# Altium PCB FIT_PM_Dual_Range_AFE.PcbDoc (part 6 of 17)
Units mm, origin at the board's own origin, x right, y up, seen from the top; angles counter-clockwise.
Board outline 259 x 114 mm, 8 copper layers (Top Layer, Mid-Layer 1, Mid-Layer 2, Layer 1, Layer 2, Mid-Layer 3, Mid-Layer 4, Bottom Layer), stack 1.616 mm thick; 963 components, 806 nets, 4757 pads, 2208 vias.
Unrouted connection lines stored in the file: 682.
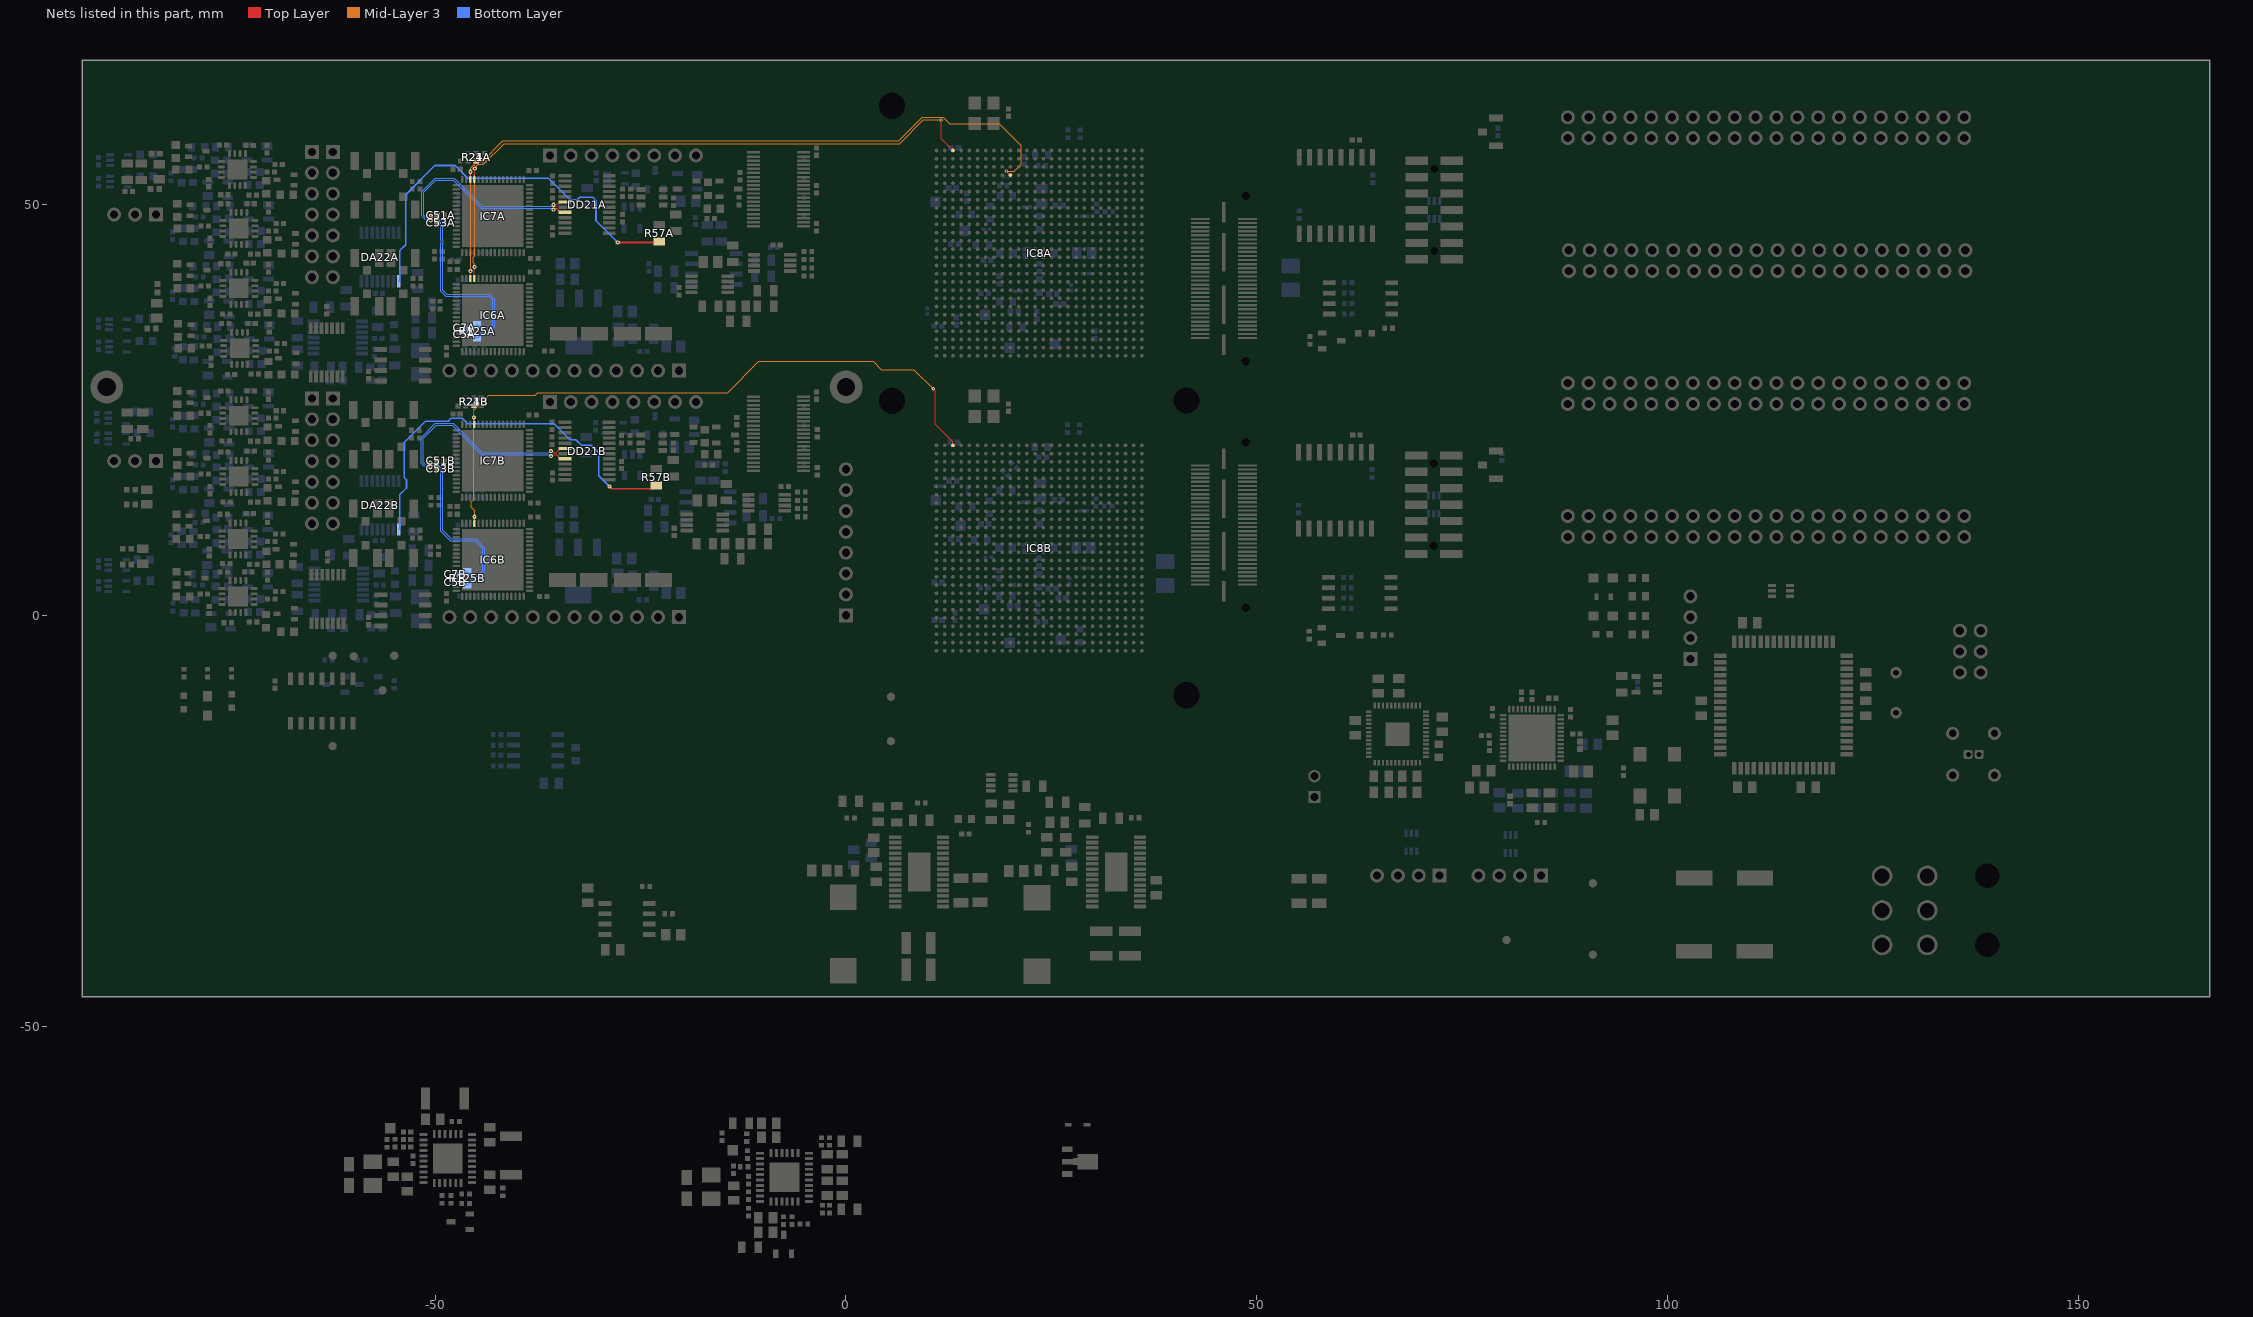
[diagram p8: the nets of this part, all layers, seen from the top]

## Part data (continued)
U1A U1B: library part CMP-0327-00232-3, "2.0 Gbps 4 x 4 Crosspoint Switch with CML, LVDS, LVPECL Input and LVDS Output, 4 Tx and 4 Rx, -40 to +85 degC, 38-pin TSSOP (DBT), Green (RoHS & no Sb/Br)", Manufacturer="Texas Instruments", ComponentLink1Description="Manufacturer URL", ComponentLink1URL=http://www.ti.com/, ComponentLink2Description=Datasheet, ComponentLink2URL=http://www.ti.com/general/docs/lit/getliterature.tsp?genericPartNumber=SN65LVDS250&fileType=pdf, ComponentLink3Description="URL Link1", ComponentLink3URL=SamplesURL:http://www.ti.com/product/sn65lvds250#samples, Crosspoint-Switch=TRUE, DatasheetVersion=SLLS594B, Eco-Plan="Green (RoHS & no Sb/Br)", ESD HBM(kV)=3, Function=Crosspoint, ICC(Max)(mA)=145, Input Signal="CML, LVDS, LVPECL", Mounting Technology="Surface Mount", No. of Rx=4, No. of Tx=4, Output Signal=LVDS, PackageDescription="38-Pin Plastic Small Outline 0.5 mm Pitch", PackageReference=DBT0038A, PackageVersion="revI, Mar-2011", Part-to-Part Skew(Max)(ps)=300, PartNumber=SN65LVDS250DBTR, Peak-to-Peak Jitter(Max)(ps)=110, Signaling Rate(Mbps)=2000, SubFamily="Crosspoint-Switch (>1Gbps)"
VD4 VD8 VD13: library part LED_KINGBRIGHT_KPT-2012SURCK, "LED Red 1C 2A", Case=0805, Manufacturer=KINGBRIGHT, Manufacturer Part Number=KPT-2012SURCK, Author="CERN DEM BC", Bonding=No, Color=Red, Component Type=Standard, ComponentHeight=0.75mm, CreateDate=06.11.2020, HelpURL=\\cern.ch\dfs\Applications\Altium\Datasheets\LED_KINGBRIGHT_KPT-2012SURCK.pdf, LatestRevisionDate=06.11.2020, Mounted=Yes, PackageDescription="SMT Hyper Red LED, Case 2012, Body L 2.00mm X  W 1.25mm X H 0.75mm", Part Description="2.0X1.25mm, SMD Hyper Red Chip LED Lamp, KPT-2012 Series", Part Number=LED_KINGBRIGHT_KPT-2012SURCK, Pin Count=2, PressFit=No, Sense=No, SMD=Yes, Socket=No
VD5A VD5B: "Diode Schottky  Anode Pin 1 Cathode Pin 3 (Pas de pin 2)", Case=SOT23-3, Manufacturer="ON SEMICONDUCTOR", Manufacturer Part Number=BAS70L, Power=70mA, Voltage=70V, Author="CERN DEM JLC", Bonding=No, Component Type=Standard, ComponentHeight=1.1mm, CreateDate=11.09.2018, Device=BAS70LT1G, HelpURL=\\cern.ch\dfs\Applications\Altium\Datasheets\BAS70LT1G.pdf, LatestRevisionDate=24.05.2022, Mounted=Yes, PackageDescription="SOT, 0.95mm Pitch; 3 Pin, 1.30mm W X 2.90mm L X 1.10mm H body, IPC Medium Density", Part Description="Schottky Barrier Diode", Part Number=BAS70LT1G, Pin Count=3, PressFit=No, Sense=No, SMD=Yes, Socket=No
VT1A VT1B VT2A VT2B: "PNP Transistor", Case=SOT23-3, Manufacturer="NXP SEMICONDUCTORS", Author="CERN DEM HF", Bonding=No, Component Type=Standard, ComponentHeight=1.1mm, CreateDate=06.05.2024, Device=BF550, HelpURL=\\cern.ch\dfs\Applications\Altium\Datasheets\BF550.pdf, LatestRevisionDate=06.05.2024, Manufacturer Part Number=BF550, Mounted=Yes, PackageDescription="SOT23, 0.95mm Pitch; 3 Pin, 1.30mm W X 2.90mm L X 1.10mm H body, IPC Medium Density", Part Description="40V 25mA PNP Medium Frequency Transistor", Part Number=BF550, Pin Count=3, PressFit=No, Sense=No, SMD=Yes, Socket=No
VT3A VT3B VT3C VT3D VT4A VT4B VT4C VT4D VT5A VT5B VT5C VT5D VT6A VT6B VT6C VT6D VT11A VT11B: "30V, 50 mA N-Channel Enhancement Switching Transistor", Case=SOT143, Manufacturer="Linear Systems", Bonding=No, Component Type=Standard, ComponentHeight=1.3mm, CreateDate=01.07.2014, HelpURL=\\cern.ch\dfs\Applications\Altium\Datasheets\BSS83,215.pdf, LatestRevisionDate=17.05.2016, Mounted=Yes, PackageDescription="SOT143, 4-Leads, Body 3.0x2.6mm (max), Pitch 1.92mm, IPC Medium Density", Part Description="30V, 50mA, N-Channel Enhancement Switching Transistor", Pin Count=4, PressFit=No, Sense=No, SMD=Yes, Socket=No, Status=Obsolete
  VT3A VT3B VT3C VT3D VT4A VT4B VT4C VT4D VT5A VT5B VT5C VT5D VT6A VT6B VT6C VT6D: Author=GK, Device=SST210-SOT-143-4L-CT, Manufacturer Part Number=SST210-SOT-143-4L-CT, Part Number=SST210-SOT-143-4L-CT
  VT11A VT11B: Author="CERN DEM JLC", Device=SST211, Manufacturer Part Number=SST211, Part Number=SST211
X1A X1B: library part SAMTEC_DW-03-09-L-S-470, "Connector 3 Male", Manufacturer=SAMTEC, Manufacturer Part Number=DW-03-09-L-S-470, Author="CERN DEM HF", Component Type=Standard, ComponentHeight=15.75mm, CreateDate=06.06.2024, Family="Header 3", HelpURL=\\cern.ch\dfs\Applications\Altium\Datasheets\SAMTEC_DW.pdf, LatestRevisionDate=06.06.2024, Mounted=Yes, Part Description="3 Contacts, Pitch 2.54mm, Single Row Straight .Flex Stack, Flexible Board Stacker (Stacker Height = 11,938mm)", Part Number=SAMTEC_DW-03-09-L-S-470, Pin Count=3, PressFit=No, Sense=No, SMD=No, Socket=No, Status=None
"X4 - nowyA" "X4 - nowyB" X7: library part SAMTEC_DW-08-09-L-S-470, "Connector 8 Male", Manufacturer=SAMTEC, Manufacturer Part Number=DW-08-09-L-S-470, Author="CERN DEM HF", Component Type=Standard, ComponentHeight=15.75mm, CreateDate=06.06.2024, Family="Header 8", HelpURL=\\cern.ch\dfs\Applications\Altium\Datasheets\SAMTEC_DW.pdf, LatestRevisionDate=06.06.2024, Mounted=Yes, Part Description="8 Contacts, Pitch 2.54mm, Single Row Straight .Flex Stack, Flexible Board Stacker (Stacker Height = 11,938mm)", Part Number=SAMTEC_DW-08-09-L-S-470, Pin Count=8, PressFit=No, Sense=No, SMD=No, Socket=No, Status=None
X5 X6 X9 X10: library part CONNFLY_DS1013-40SSIB1-B-0, "Connector 40 Male", Manufacturer=CONNFLY, Manufacturer Part Number=DS1013-40SSIB1-B-0, Author="CERN DEM HF", Component Type=Standard, ComponentHeight=9.1mm, CreateDate=30.05.2024, HelpURL=\\cern.ch\dfs\Applications\Altium\Datasheets\CONNFLY_DS1013.pdf, LatestRevisionDate=30.05.2024, Mounted=Yes, Part Description="40 Contacts, 2.54mm Box Header V/T,R/A & SMT Type", Part Number=CONNFLY_DS1013-40SSIB1-B-0, Pin Count=40, PressFit=No, Sense=No, SMD=No, Socket=No, Status=None
X8: library part LEMO_EPG.00.302.NLN, Manufacturer=LEMO, Manufacturer Part Number=EPG.00.302.NLN, Author="CERN DEM JLC", Component Type=Standard, ComponentHeight=7mm, CreateDate=25.08.2010, Family="LEMO 00", HelpURL=\\cern.ch\dfs\Applications\Altium\Datasheets\LEMO_EPG.00.302.NLN.pdf, LatestRevisionDate=20.12.2010, Mounted=Yes, Part Description="Size 00, Elbow Socket (90°) with 2 Female Contacts and Alignment Key (G)", Part Number=LEMO_EPG.00.302.NLN, Pin Count=3, PressFit=No, SCEM=09.31.28.007.2, Sense=No, SMD=No, Socket=No, Status=None
X11: library part CONNFLY_DS1013-06SSIB1-B-0, "Connector 6 Male", Manufacturer=CONNFLY, Manufacturer Part Number=DS1013-06SSIB1-B-0, Author="CERN DEM HF", Component Type=Standard, ComponentHeight=9.1mm, CreateDate=30.05.2024, HelpURL=\\cern.ch\dfs\Applications\Altium\Datasheets\CONNFLY_DS1013.pdf, LatestRevisionDate=30.05.2024, Mounted=Yes, Part Description="6 Contacts, 2.54mm Box Header V/T,R/A & SMT Type", Part Number=CONNFLY_DS1013-06SSIB1-B-0, Pin Count=6, PressFit=No, Sense=No, SMD=No, Socket=No, Status=None
X15: library part MOLEX_15-24-9067, "Connector 6 Male", Manufacturer=MOLEX, Manufacturer Part Number=15-24-9067, Author="CERN DEM HF", Component Type=Standard, ComponentHeight=15mm, CreateDate=06.06.2024, Family="Mini-Fit BMI", HelpURL=\\cern.ch\dfs\Applications\Altium\Datasheets\MOLEX_15-24-9067.pdf, LatestRevisionDate=06.06.2024, Mounted=Yes, Part Description="Mini-Fit BMI Header, Dual Row, Right-Angle, with Snap-in Plastic Peg PCB Lock, 6 Circuits, Gold (Au) Plating", Part Number=MOLEX_15-24-9067, Pin Count=6, PressFit=No, Sense=No, SMD=No, Socket=No, Status=None
X20A X20B X20C X20D: library part SAMTEC_DW-07-09-L-S-470, "Connector 7 Male", Manufacturer=SAMTEC, Manufacturer Part Number=DW-07-09-L-S-470, Author="CERN DEM HF", Component Type=Standard, ComponentHeight=15.75mm, CreateDate=06.06.2024, Family="Header 7", HelpURL=\\cern.ch\dfs\Applications\Altium\Datasheets\SAMTEC_DW.pdf, LatestRevisionDate=06.06.2024, Mounted=Yes, Part Description="7 Contacts, Pitch 2.54mm, Single Row Straight .Flex Stack, Flexible Board Stacker (Stacker Height = 11,938mm)", Part Number=SAMTEC_DW-07-09-L-S-470, Pin Count=7, PressFit=No, Sense=No, SMD=No, Socket=No, Status=None
X21A X21B: library part SAMTEC_DW-12-090L-S-470, Manufacturer=SAMTEC, Manufacturer Part Number=DW-12-09-L-S-470, Familly="Header 12"
ZQ1: library part XTAL_16MHZ_ABRACON_ABL-16.000MHZ-B1U, "Quartz Crystal", Manufacturer=ABRACON, Manufacturer Part Number=ABL-16.000MHZ-B1U, Author="CERN DEM HF", Bonding=No, Component Type=Standard, ComponentHeight=3.5mm, CreateDate=04.06.2024, HelpURL=\\cern.ch\dfs\Applications\Altium\Datasheets\XTAL_ABRACON_ABL.pdf, LatestRevisionDate=04.06.2024, Mounted=Yes, PackageDescription="THD Crystal, Body 11.5mm L X 5.00mm W X 3.50mm H, ALB Series", Part Description="Tolerance: ±10ppm, Stability: ±10ppm, -20°C to +70°C, 18pF, 40 Ohms ESR, Through Mount Microprocessor Crystal, ABL Series", Part Number=XTAL_16MHZ_ABRACON_ABL-16.000MHZ-B1U, Pin Count=2, PressFit=No, Sense=No, SMD=No, Socket=No
ZQ2: library part OSC_40MHZ_IQD_LFSPXO018042, "Oscillator 4 pins 1=E 2=GND 3=OUT 4=+Vs", Manufacturer="IQD FREQUENCY PRODUCTS", Manufacturer Part Number=LFSPXO018042, Author="CERN DEM JLC", Bonding=No, Component Type=Standard, ComponentHeight=1.4mm, CreateDate=22.08.2011, HelpURL=\\cern.ch\dfs\Applications\Altium\Datasheets\OSC_IQD_LFSPXO018042.pdf, LatestRevisionDate=03.11.2016, Mounted=Yes, PackageDescription="Oscillator, Side Concave, 5.08mm Pitch, 4 Pins, 5.00mm L X 7.00mm W X 1.40mm H, CFPS-73 Series", Part Description="3.3V, ±50ppm, 50pF, 0..70°C, HCMOS Surface Mount Clock Oscillator (CFPS-73 Series)", Part Number=OSC_40MHZ_IQD_LFSPXO018042, Pin Count=4, PressFit=No, Sense=No, SMD=Yes, Socket=No

## Free pads (board coordinates)
  round 4 hole 2.2: 1(-89.981,27.799) 1(0.019,27.799)

## Via types
v1: diameter 0.5, hole 0.2, Top Layer to Bottom Layer, tented both sides, 1234 vias
v2: diameter 0.4, hole 0.2, Top Layer to Bottom Layer, tented both sides, 876 vias
v3: diameter 1, hole 0.6, Top Layer to Bottom Layer, tented both sides, 74 vias
v4: diameter 0.8, hole 0.4, Top Layer to Bottom Layer, tented both sides, 15 vias
v5: diameter 0.5, hole 0.2, Top Layer to Bottom Layer, 9 vias

## Nets (pads, with @x,y where several pads share a name; then routed paths per layer and width w, separated by ;. In a path a pad name is that pad's centre, name@x,y a point inside that pad or via, vN(x,y) a via of type N, cw(c..) or ccw(c..) an arc to the next point about the centre after c; other vN are vias at no path point)
ADC_CLK1: IC6A.13 IC7A.13 IC8A.AF24 R21A.1 R24A.2 | length 80.5
  Top Layer w0.1: IC6A.13@-45.227,41.006 -45.227,42.073 -45.2,42.1 v1(-45.2,42.4) ; IC7A.13@-45.227,53.056 -45.227,53.773 -45.188,53.812 v1(-45.188,54.382) -45.188,55.112 R21A.1@-45,55.3 ; v2(11.6,60.3) 11.6,58.005 IC8A.AF24@13.019,56.586
  Mid-Layer 3 w0.1: v1(-45.2,42.4) -45.218,42.418 -45.218,42.75 -45.392,42.924 -45.392,43.574 -45.266,43.7 -45.259,43.7 -45.2,43.759 -45.2,54.371 v1(-45.188,54.382) -45.188,54.477 -44.766,54.9 -44.138,54.9 -41.623,57.416 6.545,57.416 9.429,60.3 v2(11.6,60.3)
  Bottom Layer w0.1: v1(-45.188,54.382) -45.188,55.112 R24A.2@-45,55.3
ADC_CLK2: IC6B.13 IC7B.13 IC8B.AF24 R21B.1 R24B.2 | length 85.4
  Top Layer w0.1: R21B.1@-45.3,25.5 v1(-45.3,24.1) -45.266,24.066 -45.266,23.294 IC7B.13@-45.227,23.256 ; IC6B.13@-45.227,11.206 -45.2,11.233 v1(-45.2,12) ; v2(10.608,27.567) 10.881,27.294 10.881,23.286 13.019,21.147 IC8B.AF24@13.019,20.686
  Mid-Layer 3 w0.1: v1(-45.2,12) -45.2,12.754 -45.6,13.154 -45.6,13.8 -45.3,14.1 v1(-45.3,24.1) -45.3,24.95 -43.453,26.797 -37.818,26.797 -37.499,27.116 -37.299,27.116 -14.384,27.116 -10.6,30.9 3.3,30.9 4.3,29.9 8.275,29.9 v2(10.608,27.567)
  Bottom Layer w0.1: v1(-45.3,24.1) R24B.2@-45.3,25.5
ADC_CLK_DELAYA: DA22A.1 R57A.2 | length 48.9
  Top Layer w0.2: v1(-27.784,45.38) -22.82,45.38 R57A.2@-22.7,45.5
  Bottom Layer w0.2: DA22A.1@-54.425,40.65 -54.3,40.775 -54.3,44.4 -53.6,45.1 -53.6,51.2 -50.05,54.75 -47.55,54.75 -46.02,53.22 -36.22,53.22 -33.601,50.601 -32.722,50.601 -32.423,50.9 -30.784,50.9 -30.426,50.541 -30.426,48.022 v1(-27.784,45.38)
ADC_CLK_DELAYB: DA22B.1 R57B.2 | length 48.3
  Top Layer w0.2: v1(-28.8,15.7) -28.5,15.4 -27.7,15.4 -27.675,15.425 -23.475,15.425 R57B.2@-23.1,15.8
  Bottom Layer w0.2: DA22B.1@-54.425,10.45 -54.3,10.575 -54.3,14.7 -53.5,15.5 -53.5,16.518 -53.75,16.768 -53.75,21.05 -51.173,23.627 -48.43,23.627 -48.083,23.974 -46.71,23.974 -46.073,23.337 -35.537,23.337 -33.587,21.387 -32.887,21.387 -32.199,20.699 -30.999,20.699 -30.1,19.8 -30.1,17 v1(-28.8,15.7)
ADC_CLKA_N: C7A.1 C53A.1 DD21A.18 R125A.2 | length 49.2
  Top Layer w0.145: v1(-50.541,48.038) -50.445,48.038 -50.313,48.17 -50.159,48.17 C53A.1@-49.75,47.762 ; v1(-35.6,49.982) -35.6,49.905 -35.5,49.805 -35.232,49.805 -35.148,49.89 -35.148,49.954 -35.045,50.056 -35.036,50.056 -34.775,50.317 DD21A.18@-34.2,50.317
  Bottom Layer w0.145: C7A.1@-46,35 -45.762,34.763 -45.635,34.763 -45.595,34.723 -45.385,34.723 -45.3,34.807 -45.3,35.023 -44.923,35.4 R125A.2@-44.9,35.4 -44.85,35.4 -44.472,35.023 -44.472,34.809 -44.388,34.724 -43.504,34.724 -42.973,35.254 -42.973,38.327 -43.501,38.855 -48.701,38.855 -49.3,39.454 -49.3,45.302 -49.279,45.324 -49.279,45.674 -49.3,45.695 -49.3,47.8 -49.715,48.215 -50.279,48.215 -50.456,48.038 v1(-50.541,48.038) -50.541,48.13 -50.626,48.215 -51.238,48.215 -51.639,48.615 -51.639,51.588 -50.006,53.22 -47.709,53.22 -44.293,49.805 -35.862,49.805 -35.685,49.982 v1(-35.6,49.982)
ADC_CLKA_P: C5A.1 C51A.1 DD21A.20 R125A.1 | length 49.2
  Top Layer w0.145: v1(-50.541,48.638) -50.473,48.638 -50.279,48.444 -50.073,48.444 -50.043,48.474 -49.988,48.474 C51A.1@-49.75,48.711 ; v1(-35.6,49.382) -35.6,49.46 -35.5,49.56 -35.232,49.56 -35.148,49.475 -35.148,49.411 -35.045,49.309 -35.036,49.309 -34.775,49.047 DD21A.20@-34.2,49.047
  Bottom Layer w0.145: C5A.1@-46,34.2 -45.762,34.437 -45.635,34.437 -45.595,34.478 -45.385,34.478 -45.3,34.393 -45.3,34.178 -44.923,33.8 R125A.1@-44.9,33.8 -44.85,33.8 -44.472,34.178 -44.472,34.394 -44.388,34.479 -43.402,34.479 -42.728,35.153 -42.728,38.428 -43.4,39.1 -48.6,39.1 -49.055,39.555 -49.055,45.201 -49.034,45.222 -49.034,45.775 -49.055,45.796 -49.055,47.901 -49.614,48.46 -50.279,48.46 -50.456,48.638 v1(-50.541,48.638) -50.541,48.545 -50.626,48.46 -51.137,48.46 -51.394,48.717 -51.394,51.487 -49.905,52.975 -47.81,52.975 -44.395,49.56 -35.862,49.56 -35.685,49.382 v1(-35.6,49.382)
ADC_CLKB_N: C7B.1 C53B.1 DD21B.18 R125B.2 | length 47
  Top Layer w0.145: v1(-50.6,18.025) -50.6,18.043 -50.44,18.203 -50.328,18.203 -50.122,18.203 -50.037,18.118 -50.037,18.088 C53B.1@-49.8,17.851 ; v1(-35.9,19.983) -35.804,19.983 -35.626,19.805 -35.232,19.805 -35.148,19.89 -35.148,19.954 -35.045,20.056 -35.036,20.056 -34.775,20.318 DD21B.18@-34.2,20.318
  Bottom Layer w0.145: C7B.1@-47.1,5 -46.4,5 R125B.2@-46.1,5.3 -46.05,5.3 -45.672,4.923 -45.672,4.707 -45.588,4.623 -45,4.623 -44.2,5.422 -44.2,8.077 -45.196,9.073 -48.173,9.073 -49.328,10.228 -49.328,14.896 -49.299,14.925 -49.299,15.275 -49.328,15.304 -49.328,17.628 -49.903,18.203 -50.338,18.203 -50.515,18.025 v1(-50.6,18.025) -50.685,18.025 -50.862,18.203 -51.408,18.203 -51.717,18.512 -51.717,21.63 -49.992,23.355 -47.826,23.355 -44.276,19.805 -36.162,19.805 -35.985,19.983 v1(-35.9,19.983)
ADC_CLKB_P: C5B.1 C51B.1 DD21B.20 R125B.1 | length 47
  Top Layer w0.145: v1(-50.6,18.625) -50.6,18.608 -50.44,18.448 -50.429,18.448 -50.122,18.448 -50.037,18.533 -50.037,18.563 C51B.1@-49.8,18.8 ; v1(-35.9,19.383) -35.804,19.383 -35.626,19.56 -35.232,19.56 -35.148,19.475 -35.148,19.411 -35.045,19.309 -35.036,19.309 -34.775,19.048 DD21B.20@-34.2,19.048
  Bottom Layer w0.145: C5B.1@-47.093,4.057 -46.457,4.057 R125B.1@-46.1,3.7 -46.05,3.7 -45.672,4.078 -45.672,4.293 -45.588,4.377 -44.899,4.377 -43.955,5.321 -43.955,8.178 -45.095,9.318 -48.071,9.318 -49.083,10.33 -49.083,14.794 -49.054,14.824 -49.054,15.376 -49.083,15.406 -49.083,17.73 -49.801,18.448 -50.338,18.448 -50.515,18.625 -50.685,18.625 -50.862,18.448 -51.306,18.448 -51.472,18.614 -51.472,21.528 -49.89,23.11 -47.927,23.11 -44.378,19.56 -36.162,19.56 -35.985,19.383 v1(-35.9,19.383)
ADC_DATA1: IC6A.14 IC7A.14 IC8A.AC17 | length 90.6
  Top Layer w0.1: IC6A.14@-45.727,41.006 -45.727,41.873 v1(-45.7,41.9) ; IC7A.14@-45.727,53.056 -45.727,53.973 v1(-45.7,54)
  Top Layer w0.145: v2(19.519,54.086) IC8A.AC17@20.019,53.586
  Mid-Layer 3 w0.1: v1(-45.7,41.9) v1(-45.7,54) -45.7,54.434 -45.588,54.546 -45.588,54.548 -44.91,55.227 -44.281,55.227 -41.754,57.754 6.399,57.754 9.295,60.65 11.815,60.65 12.618,59.847 18.653,59.847 21.337,57.163 21.337,54.904 20.5,54.067 19.538,54.067 v2(19.519,54.086)